# EAGLE board toyotune_3s_lvc3 (EAGLE 7.6.0)
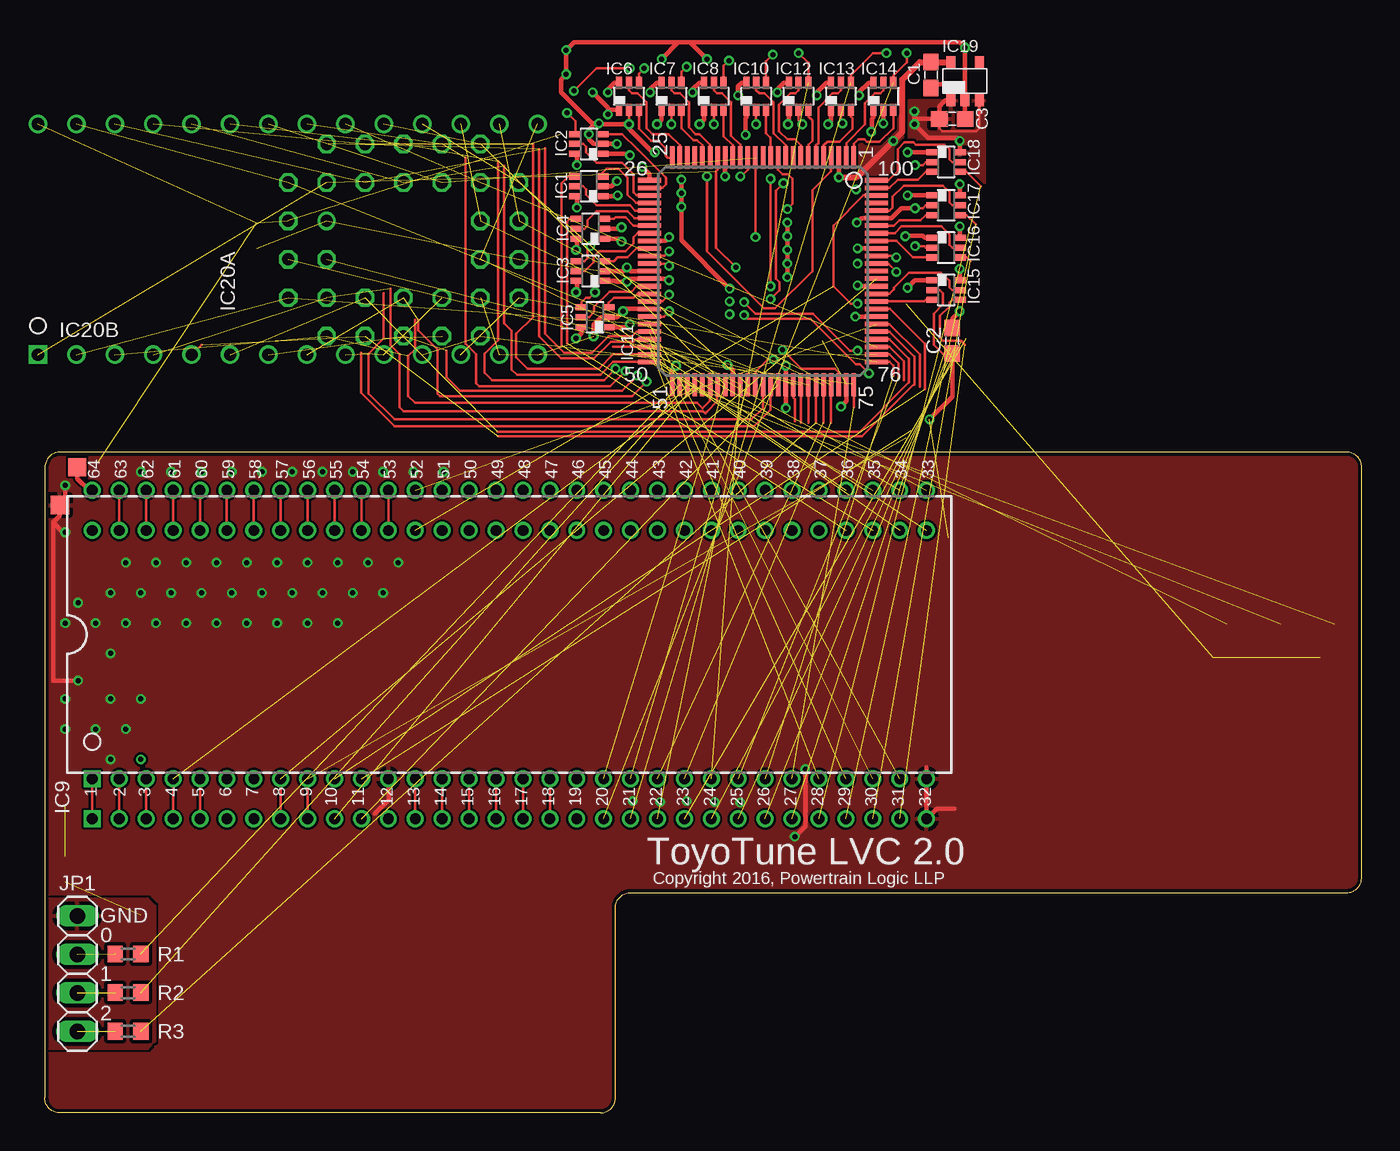
[diagram p0: board, top side]
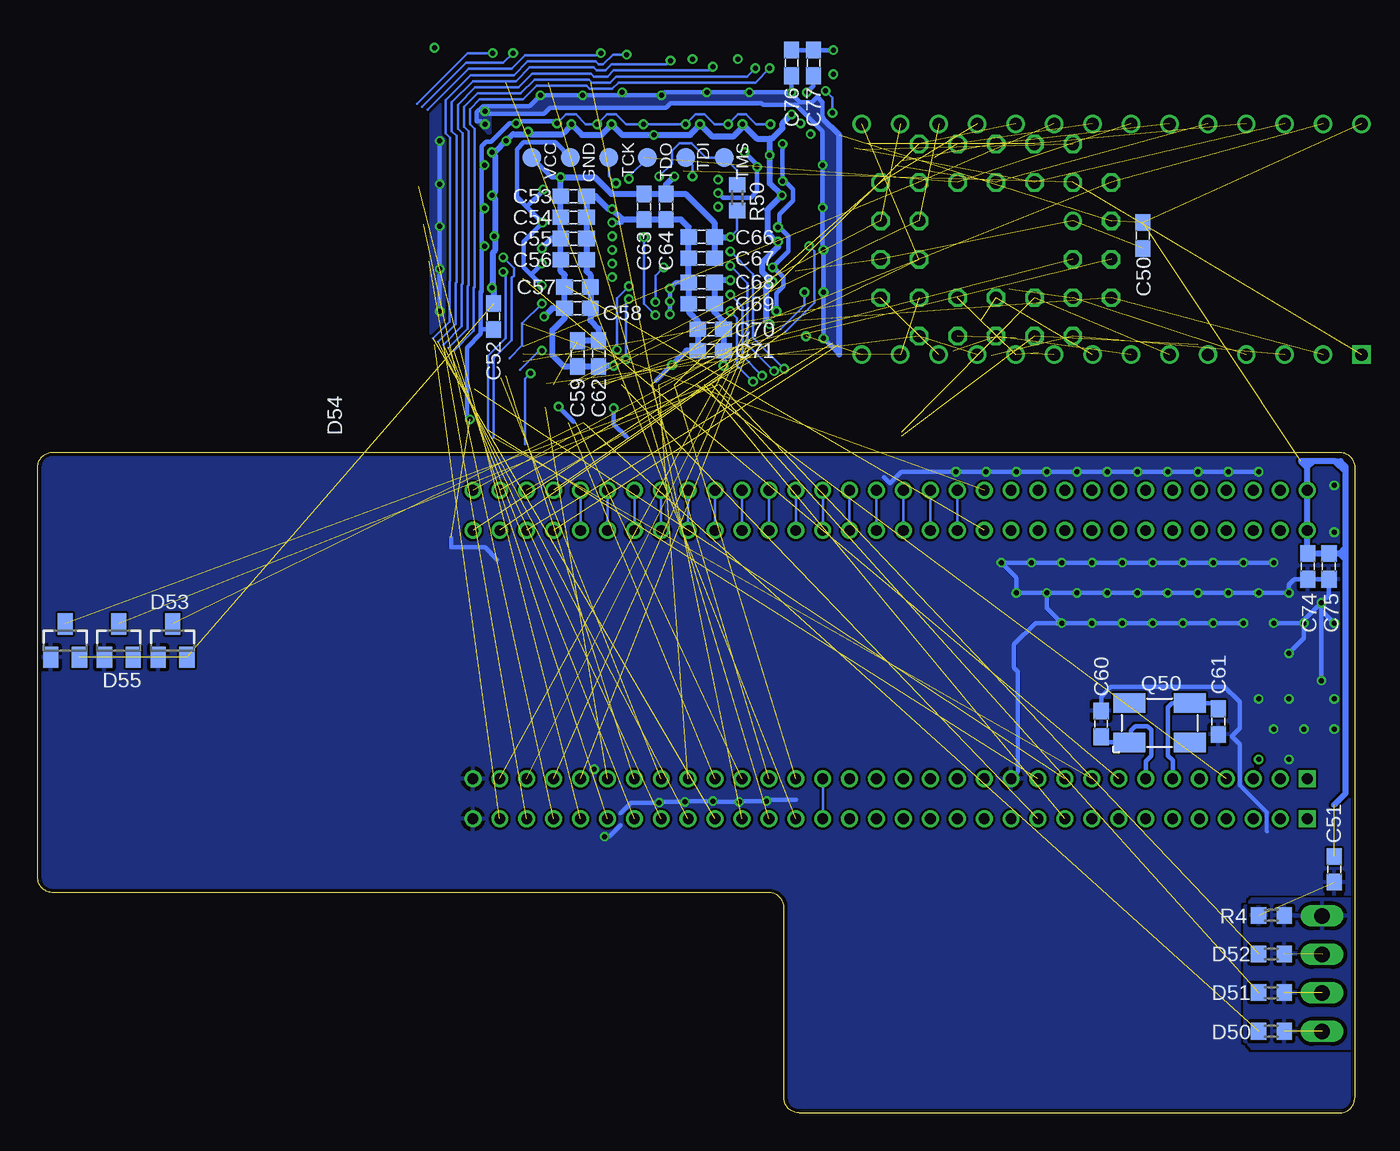
[diagram p1: board, bottom side, seen from below]

Size 87 x 43.65 mm. Coordinates in mm from the lower left corner, seen from the top.
Outline: 1.05,43.65 arc90 0,42.65 0,1 arc90 1,0 36.7,0 arc90 37.7,1 37.7,13.55 arc-90 38.7,14.55 86,14.55 arc90 87,15.55 87,42.65 arc90 86,43.65 1.05,43.65
Copper layers (1*16): Top 0.035mm / dielectric 1.5mm / Bottom 0.035mm
Design rules "pcbway": minimum track width 6mil, minimum drill 12mil, track to track 6mil, track to pad 6mil, pad to pad 6mil, via to via 6mil, smd to smd 0mil, copper to edge 10mil, drill to drill 10mil, minimum pad ring 8mil, minimum via ring 6mil, stop-mask expansion 2mil, vias tented up to drill 100mil, thermal gap 10mil

## Footprints (pad centres in the part's own frame; a part is rotated, then mirrored left to right if it is on the bottom)
C0603 = smd 1.1 x 1: 1 -0.85,0; 2 0.85,0
R0603 = smd 1 x 1.1: 1 -0.85,0; 2 0.85,0
SOT23 = smd 1 x 1.4: 1 -0.95,-1.1; 2 0.95,-1.1; 3 0,1.1
DCK_R-PDSO-G6 = smd 0.4 x 0.8: 1 -0.65,-0.9; 2 0,-0.9; 3 0.65,-0.9; 4 0.65,0.9; 5 0,0.9; 6 -0.65,0.9
SDIP-64 = drill 0.711 square: 1 -27.559,-9.525 | drill 0.711: 2 -25.781,-9.525; 3 -24.003,-9.525; 4 -22.225,-9.525; 5 -20.447,-9.525; 6 -18.669,-9.525; 7 -16.891,-9.525; 8 -15.113,-9.525; 9 -13.335,-9.525; 10 -11.557,-9.525; 11 -9.779,-9.525; 12 -8.001,-9.525; 13 -6.223,-9.525; 14 -4.445,-9.525; 15 -2.667,-9.525; 16 -0.889,-9.525; 17 0.889,-9.525; 18 2.667,-9.525; 19 4.445,-9.525; 20 6.223,-9.525; 21 8.001,-9.525; 22 9.779,-9.525; 23 11.557,-9.525; 24 13.335,-9.525; 25 15.113,-9.525; 26 16.891,-9.525; 27 18.669,-9.525; 28 20.447,-9.525; 29 22.225,-9.525; 30 24.003,-9.525; 31 25.781,-9.525; 32 27.559,-9.525; 33 27.559,9.525; 34 25.781,9.525; 35 24.003,9.525; 36 22.225,9.525; 37 20.447,9.525; 38 18.669,9.525; 39 16.891,9.525; 40 15.113,9.525; 41 13.335,9.525; 42 11.557,9.525; 43 9.779,9.525; 44 8.001,9.525; 45 6.223,9.525; 46 4.445,9.525; 47 2.667,9.525; 48 0.889,9.525; 49 -0.889,9.525; 50 -2.667,9.525; 51 -4.445,9.525; 52 -6.223,9.525; 53 -8.001,9.525; 54 -9.779,9.525; 55 -11.557,9.525; 56 -13.335,9.525; 57 -15.113,9.525; 58 -16.891,9.525; 59 -18.669,9.525; 60 -20.447,9.525; 61 -22.225,9.525; 62 -24.003,9.525; 63 -25.781,9.525; 64 -27.559,9.525
VQ100 = smd 1.5 x 0.3: 1 -7.5,6; 2 -7.5,5.5; 3 -7.5,5; 4 -7.5,4.5; 5 -7.5,4; 6 -7.5,3.5; 7 -7.5,3; 8 -7.5,2.5; 9 -7.5,2; 10 -7.5,1.5; 11 -7.5,1; 12 -7.5,0.5; 13 -7.5,0; 14 -7.5,-0.5; 15 -7.5,-1; 16 -7.5,-1.5; 17 -7.5,-2; 18 -7.5,-2.5; 19 -7.5,-3; 20 -7.5,-3.5; 21 -7.5,-4; 22 -7.5,-4.5; 23 -7.5,-5; 24 -7.5,-5.5; 25 -7.5,-6; 51 7.5,-6; 52 7.5,-5.5; 53 7.5,-5; 54 7.5,-4.5; 55 7.5,-4; 56 7.5,-3.5; 57 7.5,-3; 58 7.5,-2.5; 59 7.5,-2; 60 7.5,-1.5; 61 7.5,-1; 62 7.5,-0.5; 63 7.5,0; 64 7.5,0.5; 65 7.5,1; 66 7.5,1.5; 67 7.5,2; 68 7.5,2.5; 69 7.5,3; 70 7.5,3.5; 71 7.5,4; 72 7.5,4.5; 73 7.5,5; 74 7.5,5.5; 75 7.5,6 | smd 0.3 x 1.5: 26 -6,-7.5; 27 -5.5,-7.5; 28 -5,-7.5; 29 -4.5,-7.5; 30 -4,-7.5; 31 -3.5,-7.5; 32 -3,-7.5; 33 -2.5,-7.5; 34 -2,-7.5; 35 -1.5,-7.5; 36 -1,-7.5; 37 -0.5,-7.5; 38 0,-7.5; 39 0.5,-7.5; 40 1,-7.5; 41 1.5,-7.5; 42 2,-7.5; 43 2.5,-7.5; 44 3,-7.5; 45 3.5,-7.5; 46 4,-7.5; 47 4.5,-7.5; 48 5,-7.5; 49 5.5,-7.5; 50 6,-7.5; 76 6,7.5; 77 5.5,7.5; 78 5,7.5; 79 4.5,7.5; 80 4,7.5; 81 3.5,7.5; 82 3,7.5; 83 2.5,7.5; 84 2,7.5; 85 1.5,7.5; 86 1,7.5; 87 0.5,7.5; 88 0,7.5; 89 -0.5,7.5; 90 -1,7.5; 91 -1.5,7.5; 92 -2,7.5; 93 -2.5,7.5; 94 -3,7.5; 95 -3.5,7.5; 96 -4,7.5; 97 -4.5,7.5; 98 -5,7.5; 99 -5.5,7.5; 100 -6,7.5
DDC_R-PDSO-G5 = smd 0.6 x 0.8: 1 -0.95,-1.25; 2 0,-1.25; 3 0.95,-1.25; 4 0.95,1.25; 5 -0.95,1.25
S32 = drill 0.813: 1 1.27,5.08 | drill 0.813 octagon: 2 -1.27,7.62; 3 -1.27,5.08; 4 -3.81,7.62; 5 -6.35,5.08; 6 -3.81,5.08; 7 -6.35,2.54; 8 -3.81,2.54; 9 -6.35,0; 10 -3.81,0; 11 -6.35,-2.54; 12 -3.81,-2.54; 13 -6.35,-5.08; 14 -3.81,-7.62; 15 -3.81,-5.08; 16 -1.27,-7.62; 17 -1.27,-5.08; 18 1.27,-7.62; 19 1.27,-5.08; 20 3.81,-7.62; 21 6.35,-5.08; 22 3.81,-5.08; 23 6.35,-2.54; 24 3.81,-2.54; 25 6.35,0; 26 3.81,0; 27 6.35,2.54; 28 3.81,2.54; 29 6.35,5.08; 30 3.81,7.62; 31 3.81,5.08; 32 1.27,7.62
PDIP28 = drill 0.813 square: 1 -16.51,-7.62 | drill 0.813: 2 -13.97,-7.62; 3 -11.43,-7.62; 4 -8.89,-7.62; 5 -6.35,-7.62; 6 -3.81,-7.62; 7 -1.27,-7.62; 8 1.27,-7.62; 9 3.81,-7.62; 10 6.35,-7.62; 11 8.89,-7.62; 12 11.43,-7.62; 13 13.97,-7.62; 14 16.51,-7.62; 15 16.51,7.62; 16 13.97,7.62; 17 11.43,7.62; 18 8.89,7.62; 19 6.35,7.62; 20 3.81,7.62; 21 1.27,7.62; 22 -1.27,7.62; 23 -3.81,7.62; 24 -6.35,7.62; 25 -8.89,7.62; 26 -11.43,7.62; 27 -13.97,7.62; 28 -16.51,7.62
1X04 = drill 1.016 long: 1 -3.81,0; 2 -1.27,0; 3 1.27,0; 4 3.81,0
1X06_SMD = smd 1.27 x 1.27: GND 3.81,0; TCK 1.27,0; TDI -3.81,0; TDO -1.27,0; TMS -6.35,0; VCC 6.35,0
CRYSTAL-SMD-5X3 = smd 2.1 x 1.3: 1 -2,-1.3; 2 2,-1.3; 3 2,1.3; 4 -2,1.3
TP12SQ = smd 1.2 x 1.2: TP 0,0
SDIP-64-CONN = drill 0.711 square: 1 -27.559,-9.525 | drill 0.711: 2 -25.781,-9.525; 3 -24.003,-9.525; 4 -22.225,-9.525; 5 -20.447,-9.525; 6 -18.669,-9.525; 7 -16.891,-9.525; 8 -15.113,-9.525; 9 -13.335,-9.525; 10 -11.557,-9.525; 11 -9.779,-9.525; 12 -8.001,-9.525; 13 -6.223,-9.525; 14 -4.445,-9.525; 15 -2.667,-9.525; 16 -0.889,-9.525; 17 0.889,-9.525; 18 2.667,-9.525; 19 4.445,-9.525; 20 6.223,-9.525; 21 8.001,-9.525; 22 9.779,-9.525; 23 11.557,-9.525; 24 13.335,-9.525; 25 15.113,-9.525; 26 16.891,-9.525; 27 18.669,-9.525; 28 20.447,-9.525; 29 22.225,-9.525; 30 24.003,-9.525; 31 25.781,-9.525; 32 27.559,-9.525; 33 27.559,9.525; 34 25.781,9.525; 35 24.003,9.525; 36 22.225,9.525; 37 20.447,9.525; 38 18.669,9.525; 39 16.891,9.525; 40 15.113,9.525; 41 13.335,9.525; 42 11.557,9.525; 43 9.779,9.525; 44 8.001,9.525; 45 6.223,9.525; 46 4.445,9.525; 47 2.667,9.525; 48 0.889,9.525; 49 -0.889,9.525; 50 -2.667,9.525; 51 -4.445,9.525; 52 -6.223,9.525; 53 -8.001,9.525; 54 -9.779,9.525; 55 -11.557,9.525; 56 -13.335,9.525; 57 -15.113,9.525; 58 -16.891,9.525; 59 -18.669,9.525; 60 -20.447,9.525; 61 -22.225,9.525; 62 -24.003,9.525; 63 -25.781,9.525; 64 -27.559,9.525

## Placement (x,y rotation side)
C1  1uF  [C0603]  58.55,68.55 270 top  (outside the outline)
C2  0.1uF  [C0603]  59.95,51 90 top  (outside the outline)
C3  1uF  [C0603]  59.95,65.65 0 top  (outside the outline)
C50  0.1uF  [C0603]  14,57.95 90 bottom  (outside the outline)
C51  0.1uF  [C0603]  1.35,16.1 90 bottom
C52  0.1uF  [C0603]  56.9,52.6 90 bottom  (outside the outline)
C53  0.01uF  [C0603]  51.6,60.55 180 bottom  (outside the outline)
C54  0.1uF  [C0603]  51.6,59.15 180 bottom  (outside the outline)
C55  0.01uF  [C0603]  51.6,57.75 180 bottom  (outside the outline)
C56  0.1uF  [C0603]  51.6,56.35 180 bottom  (outside the outline)
C57  0.1uF  [C0603]  51.35,54.55 180 bottom  (outside the outline)
C58  0.01uF  [C0603]  51.35,53.15 180 bottom  (outside the outline)
C59  0.1uF  [C0603]  51.35,50.15 270 bottom  (outside the outline)
C60  10pF  [C0603]  16.75,25.7 90 bottom
C61  10pF  [C0603]  9,25.85 90 bottom
C62  0.01uF  [C0603]  49.95,50.15 270 bottom  (outside the outline)
C63  0.1uF  [C0603]  46.95,59.85 90 bottom  (outside the outline)
C64  0.01uF  [C0603]  45.5,59.85 90 bottom  (outside the outline)
C66  0.01uF  [C0603]  43.15,57.85 0 bottom  (outside the outline)
C67  0.1uF  [C0603]  43.15,56.45 0 bottom  (outside the outline)
C68  0.01uF  [C0603]  43.15,54.85 0 bottom  (outside the outline)
C69  0.1uF  [C0603]  43.15,53.45 0 bottom  (outside the outline)
C70  0.1uF  [C0603]  42.55,51.75 0 bottom  (outside the outline)
C71  0.01uF  [C0603]  42.55,50.35 0 bottom  (outside the outline)
C74  0.01uF  [C0603]  3.1,36.1 90 bottom
C75  0.1uF  [C0603]  1.7,36.1 90 bottom
C76  0.1uF  [C0603]  37.2,69.35 270 bottom  (outside the outline)
C77  0.1uF  [C0603]  35.75,69.35 270 bottom  (outside the outline)
D50  PGB1010603  [R0603]  5.5,5.4 180 bottom
D51  PGB1010603  [R0603]  5.5,7.95 180 bottom
D52  PGB1010603  [R0603]  5.5,10.5 180 bottom
D53  BAT54S  [SOT23]  78.1,31.2 0 bottom
D54  BAT54S  [SOT23]  85.2,31.2 0 bottom
D55  BAT54S  [SOT23]  81.65,31.2 0 bottom
IC1  SN74LVC1T45DCK  [DCK_R-PDSO-G6]  35.95,61.2 90 top  (outside the outline)
IC2  SN74LVC1T45DCK  [DCK_R-PDSO-G6]  35.95,64 90 top  (outside the outline)
IC3  SN74LVC1T45DCK  [DCK_R-PDSO-G6]  36.05,55.6 90 top  (outside the outline)
IC4  SN74LVC1T45DCK  [DCK_R-PDSO-G6]  36.05,58.4 90 top  (outside the outline)
IC5  SN74LVC1T45DCK  [DCK_R-PDSO-G6]  36.35,52.55 90 top  (outside the outline)
IC6  SN74LVC1T45DCK  [DCK_R-PDSO-G6]  38.6,67.15 0 top  (outside the outline)
IC7  SN74LVC1T45DCK  [DCK_R-PDSO-G6]  41.4,67.15 0 top  (outside the outline)
IC8  SN74LVC1T45DCK  [DCK_R-PDSO-G6]  44.2,67.15 0 top  (outside the outline)
IC9  D15180X-XXXX  [SDIP-64]  30.7,31.6 0 top
IC10  SN74LVC1T45DCK  [DCK_R-PDSO-G6]  47,67.15 0 top  (outside the outline)
IC11  XCR3128XL  [VQ100]  47.45,55.6 270 top  (outside the outline)
IC12  SN74LVC1T45DCK  [DCK_R-PDSO-G6]  49.8,67.15 0 top  (outside the outline)
IC13  SN74LVC1T45DCK  [DCK_R-PDSO-G6]  52.6,67.15 0 top  (outside the outline)
IC14  SN74LVC1T45  [DCK_R-PDSO-G6]  55.4,67.15 0 top  (outside the outline)
IC15  SN74LVC1T45DCK  [DCK_R-PDSO-G6]  59.55,54.35 270 top  (outside the outline)
IC16  SN74LVC1T45DCK  [DCK_R-PDSO-G6]  59.55,57.15 270 top  (outside the outline)
IC17  SN74LVC1T45DCK  [DCK_R-PDSO-G6]  59.55,59.95 270 top  (outside the outline)
IC18  SN74LVC1T45DCK  [DCK_R-PDSO-G6]  59.55,62.8 270 top  (outside the outline)
IC19  TLV70033  [DDC_R-PDSO-G5]  60.8,68.15 0 top  (outside the outline)
IC20A  SST39SF020WH  [S32]  23.7,57.65 90 top  (outside the outline)
IC20B  AT29C256  [PDIP28]  16.05,57.7 0 top  (outside the outline)
JP1  [1X04]  2.15,9.2 270 top
JP50  JTAG  [1X06_SMD]  48,63.1 180 bottom  (outside the outline)
Q50  16Mhz  [CRYSTAL-SMD-5X3]  12.89,25.77 0 bottom
R1  470R  [R0603]  5.5,10.5 180 top
R2  470R  [R0603]  5.5,7.95 180 top
R3  470R  [R0603]  5.5,5.4 180 top
R4  470R  [R0603]  5.5,13.05 180 bottom
R50  10K  [R0603]  40.8,60.45 270 bottom  (outside the outline)
TP_GND  TPSQTP12SQ  [TP12SQ]  1,40.15 0 top
TP_VCC  TPSQTP12SQ  [TP12SQ]  2.15,42.65 0 top
U1  D151803-CONN  [SDIP-64-CONN]  30.7,28.95 0 top

## Library data of the parts
C1-C3 C50-C64 C66-C71 C74-C77 D50-D55 IC1-IC18 IC20A IC20B JP1 JP50 Q50 R1-R4 R50 U1 = toyotune
IC19 = toyota-ecu
TP_GND TP_VCC = testpad

## Nets
!D_HALT: IC9.51 U1.51
!D_INIT: IC9.52 IC11.81
!D_IRL: IC9.5 U1.5
!D_IRP: IC9.4 IC11.55 U1.4
!D_NMI: IC9.3 U1.3
!D_RD: IC9.10 IC11.83
!D_TEST: IC9.49 U1.49
!D_WDC: IC9.53 U1.53
!D_WI: IC9.50 U1.50
!D_WR: IC9.11 IC11.89
!E_INIT: IC11.98 U1.52
!E_IS: IC11.54 U1.10
!E_OS: IC11.65 U1.11
!M_RD: IC11.14 IC20A.24 IC20B.22
!M_ROM_CS: IC11.78 IC20A.22 IC20B.20
!M_WR/M_A15: IC11.19 IC20A.31 IC20B.1
C_DRA0: IC1.5 IC11.30
C_DRA1: IC4.5 IC11.31
C_DRA2: IC3.5 IC11.33
C_DRA3: IC5.5 IC11.40
C_DRA4: IC11.85 IC15.5
C_DRA5: IC11.93 IC16.5
C_DRA6: IC11.96 IC17.5
C_DRA7: IC11.100 IC18.5
C_DRB0: IC2.5 IC11.28
C_DRB1: IC6.5 IC11.24
C_DRB2: IC7.5 IC11.20
C_DRB3: IC8.5 IC11.16
C_DRB4: IC10.5 IC11.10
C_DRB5: IC11.8 IC12.5
C_DRB6: IC11.6 IC13.5
C_DRB7: IC11.2 IC14.5
C_PA0: IC1.3 IC11.29
C_PA1: IC4.3 IC11.32
C_PA2: IC3.3 IC11.35
C_PA3: IC5.3 IC11.41
C_PA4: IC11.84 IC15.3
C_PA5: IC11.92 IC16.3
C_PA6: IC11.94 IC17.3
C_PA7: IC11.99 IC18.3
C_PB0: IC2.3 IC11.27
C_PB1: IC6.3 IC11.25
C_PB2: IC7.3 IC11.21
C_PB3: IC8.3 IC11.17
C_PB4: IC10.3 IC11.12
C_PB5: IC11.7 IC12.3
C_PB6: IC11.5 IC13.3
C_PB7: IC11.1 IC14.3
D1_XIN: C61.2 IC9.6 Q50.3
D1_XOUT: C60.1 IC9.7 Q50.1
D_A8: IC9.36 IC11.49 IC20A.27 IC20B.25
D_A9: IC9.35 IC11.50 IC20A.26 IC20B.24
D_A10: IC9.34 IC11.37 IC20A.23 IC20B.21
D_A11: IC9.33 IC11.36 IC20A.25 IC20B.23
D_A12: IC9.31 IC11.45 IC20A.4 IC20B.2
D_A13: IC9.30 IC11.46 IC20A.28 IC20B.26
D_A14: IC9.29 IC11.47 IC20A.29
D_A15: IC9.28 IC11.48
D_ADR: IC9.9 IC11.90 U1.9
D_AL0: IC11.64 IC20A.12 IC20B.10
D_AL1: IC11.63 IC20A.11 IC20B.9
D_AL2: IC11.44 IC20A.10 IC20B.8
D_AL3: IC11.42 IC20A.9 IC20B.7
D_AL4: IC11.79 IC20A.8 IC20B.6
D_AL5: IC11.80 IC20A.7 IC20B.5
D_AL6: IC11.57 IC20A.6 IC20B.4
D_AL7: IC11.56 IC20A.5 IC20B.3
D_ASR0: IC9.2 U1.2
D_ASR1: IC9.1 U1.1
D_ASR2: IC9.63 U1.63
D_ASR3: IC9.62 U1.62
D_CCLK: IC9.8 IC11.87 U1.8
D_DA0: IC9.27 IC11.75 IC20A.13 IC20B.11
D_DA1: IC9.26 IC11.76 IC20A.14 IC20B.12
D_DA2: IC9.25 IC11.77 IC20A.15 IC20B.13
D_DA3: IC9.24 IC11.60 IC20A.17 IC20B.15
D_DA4: IC9.23 IC11.72 IC20A.18 IC20B.16
D_DA5: IC9.22 IC11.71 IC20A.19 IC20B.17
D_DA6: IC9.21 IC11.61 IC20A.20 IC20B.18
D_DA7: IC9.20 IC11.58 IC20A.21 IC20B.19
D_DOUT0: IC9.61 U1.61
D_DOUT1: IC9.60 U1.60
D_DOUT2: IC9.59 U1.59
D_DOUT3: IC9.58 U1.58
D_DOUT4: IC9.57 U1.57
D_DOUT5: IC9.56 U1.56
D_DOUT6: IC9.55 U1.55
D_DOUT7: IC9.54 U1.54
D_PA0: IC1.4 U1.36
D_PA1: IC4.4 U1.35
D_PA2: IC3.4 U1.34
D_PA3: IC5.4 U1.33
D_PA4: IC15.4 U1.31
D_PA5: IC16.4 U1.30
D_PA6: IC17.4 U1.29
D_PA7: IC18.4 U1.28
D_PB0: IC2.4 U1.27
D_PB1: IC6.4 U1.26
D_PB2: IC7.4 U1.25
D_PB3: IC8.4 U1.24
D_PB4: IC10.4 U1.23
D_PB5: IC12.4 U1.22
D_PB6: IC13.4 U1.21
D_PB7: IC14.4 U1.20
D_PC0: IC9.48 U1.48
D_PC1: IC9.47 U1.47
D_PC2: IC9.46 U1.46
D_PC3: IC9.45 U1.45
D_PC4: IC9.44 U1.44
D_PC5: IC9.43 U1.43
D_PC6: IC9.42 U1.42
D_PC7: IC9.41 U1.41
D_PD0: IC9.40 U1.40
D_PD1: IC9.39 U1.39
D_PD2: IC9.38 U1.38
D_PD3: IC9.37 U1.37
D_SCLK: IC9.13 U1.13
D_SIN0: IC9.17 U1.17
D_SIN1: IC9.16 U1.16
D_SIN2: IC9.15 U1.15
D_SIN3: IC9.14 U1.14
D_SOUT0: IC9.19 U1.19
D_SOUT1: IC9.18 U1.18
GND: C1.2 C2.1 C3.2 C50.1 C51.1 C52.1 C53.1 C54.1 C55.1 C56.1 C57.1 C58.1 C59.1 C60.2 C61.1 C62.1 C63.1 C64.1 C66.1 C67.1 C68.1 C69.1 C70.1 C71.1 C74.1 C75.1 C76.1 C77.1 D53.1 D54.1 D55.1 IC1.2 IC2.2 IC3.2 IC4.2 IC5.2 IC6.2 IC7.2 IC8.2 IC9.12 IC9.32 IC10.2 IC11.11 IC11.26 IC11.38 IC11.43 IC11.59 IC11.74 IC11.86 IC11.95 IC12.2 IC13.2 IC14.2 IC15.2 IC16.2 IC17.2 IC18.2 IC19.2 IC20A.1 IC20A.16 IC20B.14 JP50.GND R4.2 TP_GND.TP U1.32
M_A15: IC11.69 IC20A.3
M_A16: IC11.68 IC20A.2
M_A17/M_A14: IC11.67 IC20A.30 IC20B.27
MSEL0: D52.2 D55.3 IC11.52 R1.1
MSEL0_ECU: JP1.2 R1.2
MSEL1: D51.2 D54.3 IC11.53 R2.1
MSEL1_ECU: JP1.3 R2.2
MSEL2: D50.2 D53.3 IC11.70 R3.1
MSEL2_ECU: JP1.4 R3.2
N$28: U1.6
N$29: U1.7
N$30: U1.12
NC1: IC11.13
NC2: IC11.22
NC3: IC11.23
NC4: IC11.9
NC5: IC11.88
NC6: IC11.97
SGND: D50.1 D51.1 D52.1 JP1.1 R4.1
TCK: IC11.62 JP50.TCK
TDI: IC11.4 JP50.TDI
TDO: IC11.73 JP50.TDO
TMS: IC11.15 JP50.TMS R50.1
VCC: C2.2 C3.1 C50.2 C51.2 C74.2 C75.2 C76.2 IC1.6 IC2.6 IC3.6 IC4.6 IC5.6 IC6.6 IC7.6 IC8.6 IC9.64 IC10.6 IC12.6 IC13.6 IC14.6 IC15.6 IC16.6 IC17.6 IC18.6 IC19.1 IC19.3 IC20A.32 IC20B.28 TP_VCC.TP U1.64
VCC_CPLD: C1.1 C52.2 C53.2 C54.2 C55.2 C56.2 C57.2 C58.2 C59.2 C62.2 C63.2 C64.2 C66.2 C67.2 C68.2 C69.2 C70.2 C71.2 C77.2 D53.2 D54.2 D55.2 IC1.1 IC2.1 IC3.1 IC4.1 IC5.1 IC6.1 IC7.1 IC8.1 IC10.1 IC11.3 IC11.18 IC11.34 IC11.39 IC11.51 IC11.66 IC11.82 IC11.91 IC12.1 IC13.1 IC14.1 IC15.1 IC16.1 IC17.1 IC18.1 IC19.5 JP50.VCC R50.2

## Tracks (layer width: path | path; a pad name or v marks a point on that pad's centre or on a via)
!D_HALT
  Bottom 0.178: U1.51 IC9.51
!D_INIT  (1 unrouted)
  Top 0.178: IC11.81 55.8,52.1 57.8,50.1 57.8,47.95
!D_IRL
  Top 0.178: U1.5 IC9.5
!D_IRP  (1 unrouted)
  Top 0.178: U1.4 IC9.4
!D_NMI
  Top 0.178: U1.3 IC9.3
!D_RD  (1 unrouted)
  Top 0.178: IC11.83 55.85,53.1 58.15,50.8 58.15,47.8
!D_TEST
  Bottom 0.178: U1.49 IC9.49
!D_WDC
  Top 0.178: U1.53 IC9.53
!D_WI
  Bottom 0.178: U1.50 IC9.50
!D_WR  (via drill 0.33)  (1 unrouted)
  Top 0.178: IC11.89 55.75,56.1 56.3,55.55 v56.25,55.55
  Bottom 0.178: v56.25,55.55 56.1,55.4 56.1,51.15 57.25,50 57.25,45.1
!E_INIT  (via drill 0.33)  (1 unrouted)
  Top 0.178: IC11.98 54.1,60.6 52.1,58.6 52.1,54.6 53.25,53.45 v53.7,53.45
  Bottom 0.178: 55.85,49.85 55,50.7 55,52.15 v53.7,53.45
!E_IS  (1 unrouted)
!E_OS  (1 unrouted)
!M_RD  (via drill 0.33)  (2 unrouted)
  Top 0.178: v46.95,57.85 IC11.14 | v46.2,52.7 46.45,52.45 50.6,52.45 53.6,49.45 53.85,49.45 v54.45,48.85
  Bottom 0.178: v46.95,57.85 46.95,53.45 v46.2,52.7 | v54.45,48.85 54.8,48.5 54.8,44.15
!M_ROM_CS  (2 unrouted)
  Top 0.178: IC11.78 55.8,50.6 56.75,49.65 56.75,48.4
!M_WR/M_A15  (via drill 0.33)  (2 unrouted)
  Top 0.178: IC11.19 44.45,62.3 44.35,62.2 44.35,57.15 v45.65,55.85 | v53.7,50.35 53.2,50.35 50.75,52.8 46.95,52.8 v46.2,53.55
  Bottom 0.178: v45.65,55.85 46.2,55.3 v46.2,53.55 | v53.7,50.35 53.9,50.35 55.15,49.1
C_DRA0
  Top 0.178: IC11.30 39,59.6 38.65,59.95 36.45,59.95 35.75,60.65 35.75,61 35.55,61.2 IC1.5
C_DRA1
  Top 0.178: IC4.5 35.65,58.4 35.85,58.6 35.85,58.95 36.45,59.55 38.5,59.55 38.95,59.1 IC11.31
C_DRA2
  Top 0.178: IC3.5 35.65,55.6 36.25,56.2 36.25,56.55 36.6,56.9 38.35,56.9 38.9,57.45 38.9,57.85 39.15,58.1 IC11.33
C_DRA3
  Top 0.178: IC11.40 39.1,54.6 38.75,54.25 37.3,54.25 36.3,53.25 36.3,52.9 35.95,52.55 IC5.5
C_DRA4
  Top 0.178: IC15.5 59.95,54.35 59.75,54.55 59.75,54.95 59.2,55.5 57.1,55.5 56.1,54.5 56.1,54.4 55.8,54.1 IC11.85
C_DRA5
  Top 0.178: IC16.5 59.95,57.15 59.75,57.35 59.75,58.05 59.25,58.55 56.6,58.55 56.15,58.1 IC11.93
C_DRA6
  Top 0.178: IC17.5 59.95,59.95 59.75,60.15 59.75,60.85 59.35,61.25 56.75,61.25 56,60.5 56,59.8 55.8,59.6 IC11.96
C_DRA7
  Top 0.178: IC18.5 59.95,62.8 59.75,63 59.75,63.65 59.45,63.95 57.55,63.95 57.4,64.1 56.8,64.1 56.35,63.65 56.35,62.2 55.75,61.6 IC11.100
C_DRB0
  Top 0.178: IC11.28 39.1,60.6 38.9,60.8 38.9,62 38.15,62.75 36.45,62.75 35.75,63.45 35.75,63.8 35.55,64 IC2.5
C_DRB1
  Top 0.178: IC11.24 41.95,63.9 41.2,64.65 40.15,64.65 39.75,65.05 39.75,66.75 39.15,67.35 38.8,67.35 38.6,67.55 IC6.5
C_DRB2
  Top 0.178: IC11.20 43.95,63.95 43.25,64.65 43,64.65 42.55,65.1 42.55,66.75 41.95,67.35 41.6,67.35 41.4,67.55 IC7.5
C_DRB3
  Top 0.178: IC11.16 45.95,63.95 45.35,64.55 45.35,66.75 44.75,67.35 44.4,67.35 44.2,67.55 IC8.5
C_DRB4
  Top 0.178: IC11.10 48.95,63.9 48.15,64.7 48.15,66.75 47.55,67.35 47.2,67.35 47,67.55 IC10.5
C_DRB5
  Top 0.178: IC11.8 49.95,63.9 49.55,64.3 49.05,64.3 48.5,64.85 48.5,66.6 49.25,67.35 49.6,67.35 49.8,67.55 IC12.5
C_DRB6
  Top 0.178: IC11.6 50.95,63.9 51.1,64.05 51.1,66.4 52.05,67.35 52.4,67.35 52.6,67.55 IC13.5
C_DRB7
  Top 0.178: IC14.5 55.4,67.55 55.2,67.35 54.85,67.35 54.2,66.7 54.2,65.3 52.95,64.05 IC11.2
C_PA0
  Top 0.178: IC1.3 36.85,62.1 37.1,62.35 37.9,62.35 38.5,61.75 38.5,60.65 39.05,60.1 IC11.29
C_PA1
  Top 0.178: IC11.32 38.9,58.6 38.35,59.15 37.7,59.15 37.6,59.05 IC4.3
C_PA2
  Top 0.178: IC3.3 37.6,56.25 37.85,56.5 38.5,56.5 39.1,57.1 IC11.35
C_PA3
  Top 0.178: IC5.3 37.25,53.5 37.6,53.85 38.9,53.85 39.15,54.1 IC11.41
C_PA4
  Top 0.178: IC15.3 58.2,53.7 58.1,53.6 IC11.84
C_PA5
  Top 0.178: 54.75,57.6 IC11.92 56.25,57.6 57.35,56.5 IC16.3
C_PA6
  Top 0.178: 54.8,58.6 IC11.94 56.1,58.6 56.45,58.95 57.85,58.95 58.2,59.3 IC17.3
C_PA7
  Top 0.178: IC11.99 55.8,61.1 56.35,61.65 57.7,61.65 58.2,62.15 IC18.3
C_PB0
  Top 0.178: IC2.3 38.15,64.65 39.15,63.65 41,61.8 41.05,61.75 41.05,61.35 40.8,61.1 IC11.27
C_PB1
  Top 0.178: 41.15,63.1 | 41.15,63.1 41,63.25 41,63.7 40.5,64.2 40.05,64.2 39.25,65 IC6.3 | IC11.25 41.15,63.1
C_PB2
  Top 0.178: IC7.3 42.05,65.05 42.85,64.25 43.1,64.25 43.45,63.9 IC11.21
C_PB3
  Top 0.178: IC11.17 45.45,63.9 44.85,64.5 IC8.3
C_PB4
  Top 0.178: IC10.3 47.65,64.7 47.95,64.4 IC11.12
C_PB5
  Top 0.178: IC11.7 50.45,63.95 50.7,64.2 50.7,65.55 50.45,65.8 IC12.3
C_PB6
  Top 0.178: IC13.3 53.25,65.8 53.35,65.7 53.35,65 52.5,64.15 51.7,64.15 51.45,63.9 IC11.5
C_PB7
  Top 0.178: IC14.3 56.05,65.05 55.15,64.15 54.3,64.15 54.15,64.3 53.75,64.3 53.45,64 IC11.1
D1_XIN
  Bottom 0.305: IC9.6 12.03,23.28 12.35,23.6 12.35,26.8 12.08,27.07 Q50.3 9,27.07 C61.2
D1_XOUT
  Bottom 0.305: IC9.7 13.81,23.24 13.45,23.6 13.45,25.3 13.7,25.55 14.5,25.55 14.8,25.25 14.8,24.56 Q50.1 16.75,24.47 C60.1
D_A8  (3 unrouted)
  Top 0.178: IC11.49 37.55,50.1 36.6,49.15 31.9,49.15 31.15,49.9 31.15,51.45 32.25,52.55 32.25,64
D_A9  (3 unrouted)
  Top 0.178: IC11.50 37.55,49.6 36.7,48.75 31.2,48.75 30.85,49.1 30.85,51.65 30.35,52.15 30.35,62.55
D_A10  (via drill 0.33)  (3 unrouted)
  Top 0.178: IC11.37 41.1,56.1 v41.25,55.95 | v38.35,49 37.35,48 28.7,48 28.5,48.2 28.5,50.1 27.8,50.8 27.8,63.1
  Bottom 0.178: v41.25,55.95 40.1,54.8 40.1,50.75 v38.35,49
D_A11  (via drill 0.33)  (3 unrouted)
  Top 0.178: IC11.36 40.95,56.6 v41.25,56.9 | v37.7,49.15 36.95,48.4 29.55,48.4 29.05,48.9 29.05,50.15 29.95,51.05 29.95,62.85
  Bottom 0.178: v41.25,56.9 39.75,55.4 39.75,51.2 v37.7,49.15
D_A12  (3 unrouted)
D_A13  (3 unrouted)
  Top 0.178: IC11.46 39.1,51.6 38.8,51.3 37.25,51.3 36.15,50.2 34.3,50.2 33.05,51.45 33.05,63.7
D_A14  (2 unrouted)
  Top 0.178: IC11.47 39.05,51.1 38.9,50.95 37.4,50.95 36.3,49.85 34.1,49.85 32.65,51.3 32.65,63.65
D_A15  (1 unrouted)
  Top 0.178: IC11.48 37.55,50.6
D_ADR  (via drill 0.33)  (1 unrouted)
  Top 0.178: U1.9 IC9.9 | IC11.90 56.15,56.6 v56.25,56.5
  Bottom 0.178: IC9.9 17.35,22.09 | v56.25,56.5 55.55,55.8 55.55,55.3 55.7,55.15 55.7,51.05 56.9,49.85 56.9,44.6
D_AL0  (2 unrouted)
  Top 0.178: IC11.64 47.95,46.45 46.85,45.35 23.1,45.35 20.9,47.55 20.9,50.2
D_AL1  (2 unrouted)
  Top 0.178: IC11.63 47.45,46.55 46.7,45.8 23.1,45.8 21.4,47.5 21.4,50.15 22.4,51.15 22.4,54.15
  Bottom 0.178: IC20B.9 | IC20A.11
D_AL2  (via drill 0.33)  (2 unrouted)
  Top 0.178: v41.25,52.95 40.9,52.6 IC11.44 | v39.75,48.3 38.8,47.35 26.1,47.35 25.95,47.5 25.95,50.4 24.65,51.7 24.65,52.4
  Bottom 0.178: v41.25,52.95 40.8,52.5 40.8,49.35 v39.75,48.3
D_AL3  (via drill 0.33)  (2 unrouted)
  Top 0.178: IC11.42 40.8,53.6 v41.25,54.05 | v39.15,48.7 38.15,47.7 27.45,47.7 26.55,48.6 26.55,50.35
  Bottom 0.178: v41.25,54.05 40.45,53.25 40.45,50 v39.15,48.7 | IC20B.7 14.8,50.08
D_AL4  (2 unrouted)
  Top 0.178: IC11.79 55.8,51.1 57.1,49.8 57.1,48.25 53.85,45 29.9,45
  Bottom 0.178: IC20B.6
D_AL5  (2 unrouted)
  Top 0.178: IC11.80 55.8,51.6 57.45,49.95 57.45,48.15 | 57.45,48.1 57.45,48.15 | IC20B.5 10.37,50.75 | 57.45,48.15 54,44.7 29.95,44.7
  Bottom 0.178: IC20A.7
D_AL6  (2 unrouted)
  Top 0.178: IC11.57 44.4,47 43.75,46.3 43.65,46.2 43.5,46.35 23.7,46.35 23.45,46.6 23.45,50.1 22.85,50.7 22.85,54.45
D_AL7  (2 unrouted)
  Top 0.178: IC11.56 43.95,47.05 43.45,46.55 43.1,46.9 24.45,46.9 24,47.35 24,50 24.45,50.45 24.45,52.4
D_ASR0
  Top 0.178: U1.2 IC9.2
D_ASR1
  Top 0.178: U1.1 IC9.1
D_ASR2
  Top 0.178: U1.63 IC9.63
D_ASR3
  Top 0.178: U1.62 IC9.62
D_CCLK  (1 unrouted)
  Top 0.178: U1.8 IC9.8
D_DA0  (3 unrouted)
  Top 0.178: 53.45,46.6 IC11.75 | IC11.75 53.45,48.2 53.4,48.25 53.4,48.15 IC11.75
D_DA1  (3 unrouted)
  Top 0.178: IC11.76 55.8,49.6 56.05,49.35 56.05,48.7
  Bottom 0.178: IC9.26
D_DA2  (3 unrouted)
  Top 0.178: IC11.77 55.8,50.1 56.4,49.5 56.4,48.55
D_DA3  (3 unrouted)
D_DA4  (3 unrouted)
  Top 0.178: 51.95,45.6 IC11.72
D_DA5  (3 unrouted)
  Top 0.178: 51.45,45.6 IC11.71
D_DA6  (3 unrouted)
D_DA7  (3 unrouted)
D_DOUT0
  Top 0.178: U1.61 IC9.61
D_DOUT1
  Top 0.178: U1.60 IC9.60
D_DOUT2
  Top 0.178: U1.59 IC9.59
D_DOUT3
  Top 0.178: U1.58 IC9.58
D_DOUT4
  Top 0.178: U1.57 IC9.57
D_DOUT5
  Top 0.178: U1.56 IC9.56
D_DOUT6
  Top 0.178: U1.55 IC9.55
D_DOUT7
  Top 0.178: U1.54 IC9.54
D_PA0  (1 unrouted)
  Top 0.178: IC1.4 34.6,61.85 34.15,61.4 34.15,50.7
D_PA1  (1 unrouted)
  Top 0.178: IC4.4 34.7,59.05 34.5,58.85 34.5,50.85
D_PA2  (via drill 0.33)  (1 unrouted)
  Top 0.178: IC3.4 35.65,56.25 35.85,56.45 35.85,57.05 v36.05,57.25
  Bottom 0.178: 37.6,51.6 35.7,53.5 35.7,56.9 v36.05,57.25
D_PA3  (via drill 0.33)  (1 unrouted)
  Top 0.178: IC5.4 35.45,53.55 35.75,53.85 36,53.85 v36.35,54.2
  Bottom 0.178: 37.95,51.75 36.35,53.35 v36.35,54.2
D_PA4  (1 unrouted)
  Top 0.178: 60.8,50.75 60.55,51 59.35,51 59.15,51.2 59.15,52.65 59.75,53.25 59.75,53.5 59.95,53.7 IC15.4
D_PA5  (1 unrouted)
  Top 0.178: 61.15,56.25 60.9,56.5 IC16.4
D_PA6  (1 unrouted)
  Top 0.178: 61.5,58.7 60.9,59.3 IC17.4
D_PA7  (1 unrouted)
  Top 0.178: 61.85,61.2 60.9,62.15 IC18.4
D_PB0  (via drill 0.33)  (1 unrouted)
  Top 0.178: IC2.4 35.05,65.5 v34.5,66.05 | v34.95,67.5 36.45,69 v38.65,69
  Bottom 0.178: 59.5,50.35 58.2,51.65 58.2,54.5 58.15,54.55 58.15,65 58.45,65.3 58.45,66.3 57.8,66.95 54.95,66.95 54.05,67.85 50.75,67.85 50.55,67.65 49.05,67.65 48.65,68.05 39.6,68.05 v38.65,69 | v34.95,67.5 34.5,67.05 v34.5,66.05
D_PB1  (via drill 0.33)  (1 unrouted)
  Top 0.178: v39.6,69 39.25,68.65 IC6.4
  Bottom 0.178: 59.85,50.55 58.6,51.8 58.6,54.6 58.55,54.65 58.55,64.85 58.85,65.15 58.85,66.45 57.95,67.35 55.1,67.35 54.2,68.25 50.6,68.25 50.4,68.05 49.2,68.05 48.8,68.45 40.15,68.45 v39.6,69
D_PB2  (via drill 0.33)  (1 unrouted)
  Top 0.178: v42.4,69.1 42.05,68.75 IC7.4
  Bottom 0.178: 60.2,50.75 59,51.95 59,54.7 58.95,54.75 58.95,64.7 59.25,65 59.25,66.6 58.1,67.75 55.25,67.75 54.35,68.65 50.45,68.65 50.25,68.45 49.35,68.45 48.95,68.85 42.65,68.85 v42.4,69.1
D_PB3  (via drill 0.33)  (1 unrouted)
  Top 0.178: v45.2,69.5 44.85,69.15 IC8.4
  Bottom 0.178: 60.55,50.95 59.4,52.1 59.4,54.8 59.35,54.85 59.35,64.55 59.65,64.85 59.65,66.75 58.25,68.15 55.4,68.15 54.5,69.05 50.3,69.05 50.1,68.85 49.5,68.85 49.1,69.25 45.45,69.25 v45.2,69.5
D_PB4  (via drill 0.33)  (1 unrouted)
  Top 0.178: v48.1,69.9 47.65,69.45 IC10.4
  Bottom 0.178: 60.9,51.15 59.8,52.25 59.8,54.9 59.75,54.95 59.75,64.4 60.05,64.7 60.05,66.9 58.4,68.55 55.55,68.55 54.65,69.45 50.15,69.45 49.95,69.25 49.65,69.25 49,69.9 v48.1,69.9
D_PB5  (via drill 0.33)  (1 unrouted)
  Top 0.178: v49.8,70 50.45,69.35 IC12.4
  Bottom 0.178: v49.8,70 49.95,69.85 54.8,69.85 55.7,68.95 58.55,68.95 61.25,66.25
D_PB6  (via drill 0.33)  (1 unrouted)
  Top 0.178: IC13.4 53.25,68.55 54.7,70 v55.6,70
  Bottom 0.178: v55.6,70 56.25,69.35 58.7,69.35 61.6,66.45
D_PB7  (via drill 0.33)  (1 unrouted)
  Top 0.178: v56.95,70 56.95,69.4 56.05,68.5 IC14.4
  Bottom 0.178: 61.95,66.65 58.6,70 v56.95,70
D_PC0
  Bottom 0.178: U1.48 IC9.48
D_PC1
  Bottom 0.178: U1.47 IC9.47
D_PC2
  Bottom 0.178: U1.46 IC9.46
D_PC3
  Bottom 0.178: U1.45 IC9.45
D_PC4
  Bottom 0.178: U1.44 IC9.44
D_PC5
  Bottom 0.178: U1.43 IC9.43
D_PC6
  Bottom 0.178: U1.42 IC9.42
D_PC7
  Bottom 0.178: U1.41 IC9.41
D_PD0
  Bottom 0.178: U1.40 IC9.40
D_PD1
  Bottom 0.178: U1.39 IC9.39
D_PD2
  Bottom 0.178: U1.38 IC9.38
D_PD3
  Bottom 0.178: U1.37 IC9.37
D_SCLK
  Top 0.178: U1.13 IC9.13
  Bottom 0.178: U1.13
D_SIN0
  Top 0.178: U1.17 IC9.17
D_SIN1
  Top 0.178: U1.16 IC9.16
D_SIN2
  Top 0.178: U1.15 IC9.15
D_SIN3
  Top 0.178: U1.14 IC9.14
D_SOUT0
  Bottom 0.178: U1.19 IC9.19
D_SOUT1
  Top 0.178: U1.18 IC9.18
GND  (via drill 0.33)  (7 unrouted)
  Top 0.178: v57.5,57.25 58.1,57.25 58.2,57.15 IC16.2 | 57.55,59.75 58,59.75 58.2,59.95 IC17.2 | v57.5,62.6 58,62.6 58.2,62.8 IC18.2 | v52.7,65.35 52.6,65.45 IC13.2 | v50.05,65.3 49.8,65.55 IC12.2 | v44.2,65.3 IC8.2 | v41.4,65.3 IC7.2 | v47,65.3 IC10.2 | v38.6,65.3 IC6.2 | IC11.11 48.45,62.3 48.75,62 49.1,62 49.4,61.7 49.4,60.05 v49.05,59.7 | IC15.2 59.15,54.35 59.35,54.15 59.35,53.4 58.75,52.8 58.75,50.75 59.35,50.15 C2.1
  Top 0.305: v55.4,65.35 IC14.2 | 57.55,59.75 v57.5,59.75 56.6,59.75 55.95,59.1 IC11.95 53.95,59.1 v53.65,58.8 | IC3.2 38.2,55.6 v38.45,55.85 38.7,55.6 IC11.38 | v38.1,58.5 38,58.4 IC4.2 | v37.8,61.55 37.45,61.2 IC1.2 | v37.8,64 IC2.2 36.25,64 35.95,64.3 v35.95,64.65 35.95,64.95 36.35,65.35 v36.6,65.35 | IC11.59 45.45,49.05 v45.1,49.4 | 60.8,67.95 58.8,67.95 58.8,67.7 C1.2 | C3.2 IC19.2 60.8,67.95 | 60.8,67.95 v60.8,70.35 60.45,70.7 42.7,70.7 | IC11.43 38.35,53.1 v38.2,52.95 37.8,52.55 IC5.2 36.75,52.55 36.25,52.05 v36.25,51.3 | v37.8,61.55 | v37.8,61.55 | IC11.26 39.95,62 v39.47,62.48 | v40.3,63.45 40.15,63.45 38.6,65 v38.6,65.3 | v38.6,65.3 | 41.85,70.7 34.95,70.7 v34.45,70.2 v34.45,68.6 34.1,68.25 34.1,67.4 36.15,65.35 v36.6,65.35 | IC11.74 52.95,47 v52.6,46.65 | IC9.32 U1.32 58.93,20.1 60.1,20.1 | IC9.32 58.25,22.1 | C2.1 59.95,47.3 v58.45,45.8 | 58.26,22.84 IC9.32 | IC9.12 22.7,20.65 21.8,19.75 | 0.55,39 1,39.45 TP_GND.TP 1.35,40.5 v1.35,41.45 | 0.55,39 0.55,28.55 v2.2,28.55 | IC11.86 53.75,54.6 v53.7,54.65 | v49.55,18.25 50.25,18.95 v50.25,22.7 | 0.55,39 1.2,38.35 v1.35,38.35 | v36.6,65.35 36.65,65.3 v38.6,65.3 | 41.85,70.7 v40.75,69.6 | 41.85,70.7 42.7,70.7 | v43.75,69.6 42.7,70.65 42.7,70.7 | v42.05,61.65 v42.05,60.75 v42.05,59.85 42.05,57.65 v45.25,54.45 | v49.05,55.2 v49.05,56.1 v49.05,57 v49.05,57.9 v49.05,58.8
  Bottom 0.178: v57.5,62.6 57.5,62.75 | v52.7,65.35 52.1,65.95 51.45,65.95 50.8,65.3 v50.05,65.3 49.4,65.95 48.8,65.95 48.15,65.3 v47,65.3 v44.2,65.3 43.55,65.95 42.95,65.95 42.3,65.3 v41.4,65.3 40.75,65.95 40.2,65.95 39.55,65.3 v38.6,65.3 | 57.5,59.7 v57.5,59.75
  Bottom 0.279: 5.8,18.6 5.8,19.85 7.6,21.65
  Bottom 0.305: v57.5,59.75 57.7,59.95 57.7,62.4 v57.5,62.6 57.7,62.8 57.7,63.85 57.4,64.15 57.05,64.15 55.85,65.35 v55.4,65.35 55.25,65.5 52.85,65.5 v52.7,65.35 | 57.7,54.25 57.75,54.2 57.7,54.25 | 57.7,54.25 57.7,57.05 v57.5,57.25 57.7,57.45 57.7,59.5 57.5,59.7 | 57.7,54.25 | 38,58.5 37.4,57.9 | 37.4,57.9 | 37.4,57.9 37.4,56.9 v38.45,55.85 38.4,55.85 37.75,55.2 37.75,54.6 38.2,54.15 v38.2,52.95 | v37.8,64 v37.8,61.55 37.65,61.55 37.1,61 37.1,60.25 | 54.43,55.38 54.9,55.85 54.9,57.55 v53.65,58.8 54.7,59.85 | 54.43,55.38 v53.7,54.65 | 57.7,54.25 57.75,54.25 57.75,51.75 | v38.6,65.3 38.6,65.5 | 37.1,60.25 | 38,58.5 38,59.35 37.1,60.25 | 37.1,60.25 | 38,58.5 v38.1,58.5 | v38.1,58.5 | 51.6,45.65 v52.6,46.65 | JP50.GND 52.81,64.1 54.9,64.1 55.35,63.65 55.35,60.5 54.7,59.85 | v34.45,70.2 C77.1 C76.1 | 57.75,51.75 57.75,51.45 58.65,50.55 58.65,45.98 58.63,45.98 v58.45,45.8 | 31.1,42 30.7,41.6 29.95,42.35 v26.35,42.35 v24.35,42.35 v22.35,42.35 v20.35,42.35 v18.35,42.35 v16.35,42.35 v14.35,42.35 v12.35,42.35 v10.35,42.35 v8.35,42.35 v6.35,42.35 | C60.2 16.75,27.5 16.1,28.15 8.6,28.15 7.6,27.15 7.6,25.4 8.13,24.87 7.6,24.34 7.6,21.65 | v2.2,28.55 v2.2,33.7 | v2.2,33.7 1.7,34.2 C75.1 C74.1 4,35.25 4.35,34.9 v4.35,34.35 v6.35,34.35 v8.35,34.35 v10.35,34.35 v12.35,34.35 v14.35,34.35 v16.35,34.35 v18.35,34.35 v20.35,34.35 | 57.75,51.75 C52.1 | 36.9,20.7 38.75,20.7 v38.85,20.6 40.6,20.6 v40.65,20.55 42.35,20.55 v42.4,20.6 44.2,20.6 v44.25,20.55 45.9,20.55 v45.95,20.5 47.8,20.5 48.5,19.8 | 48.5,19 49.25,18.25 v49.55,18.25 | v53.6,61 53.6,60.95 54.7,59.85 | 54.43,55.38 v53.7,56.1 | v45.1,49.4 46.15,48.35
  Bottom 0.305: IC9.12 22.25,22.52 22.25,29.15 22.5,29.4 22.5,30.95 21.1,32.35 v19.35,32.35 | v5.35,36.35 v7.35,36.35 v9.35,36.35 v11.35,36.35 v13.35,36.35 v15.35,36.35 v17.35,36.35 v19.35,36.35 v21.35,36.35 v23.35,36.35 22.35,35.35 v22.35,34.35 v20.35,34.35 | v20.35,34.35 20.35,33.35 v19.35,32.35 | v19.35,32.35 v17.35,32.35 v15.35,32.35 v13.35,32.35 v11.35,32.35 v9.35,32.35 v7.35,32.35 | v3.35,32.35 v5.35,32.35 | v4.35,30.35 3.35,31.35 v3.35,32.35 | v2.2,33.7 3.35,32.55 v3.35,32.35 | v1.35,32.35 2.2,33.2 v2.2,33.7 | 56.65,36.55 57.45,37.35 59.7,37.35 59.7,38 | 48.45,59.1 48.45,58.8 v49.05,58.8 | v42.05,60.75 41.75,60.45 39.9,60.45 39.47,60.88 v39.47,62.48 39.47,62.62 v40.3,63.45 | C68.1 44.85,54.85 v45.25,54.45 v45.25,53.6 v45.25,52.75
  Bottom 0.406: C59.1 C62.1 49.95,51.8 50.5,52.35 C58.1 C57.1 50.5,55.35 50.75,55.6 C56.1 C55.1 C54.1 C53.1 50.15,60.55 49.3,59.7 v49.05,59.7 48.45,59.1 48.45,59 C63.1 C64.1 44.5,59 44,58.5 C66.1 C67.1 C68.1 C69.1 43.95,53.4 43.95,52.85 43.4,52.3 C70.1 C71.1 44.15,50.35 v45.1,49.4
  other vias: 1.35,27.35 1.35,25.35 4.35,27.35 3.35,25.35 6.35,27.35 5.35,25.35 4.35,23.35
  pour Top (isolate 0.152, rank 2): -1.45,44.7 87.8,44.7 87.85,-2.6 -1.45,-2.6
  pour Bottom (isolate 0.152, rank 2): -1.45,44.7 87.8,44.7 87.8,-2.6 -1.45,-2.6
GND6  (via drill 0.33)
  other vias: 6.35,23.35
M_A15  (1 unrouted)
  Top 0.178: 50.45,45.6 IC11.69
M_A16  (1 unrouted)
  Top 0.178: 49.95,45.6 IC11.68
M_A17/M_A14  (2 unrouted)
  Top 0.178: 49.55,45.7 49.55,47.15 49.45,47.25 IC11.67
MSEL0  (3 unrouted)
MSEL0_ECU  (1 unrouted)
MSEL1  (3 unrouted)
MSEL1_ECU  (1 unrouted)
MSEL2  (3 unrouted)
  Top 0.178: 50.95,45.6 IC11.70
MSEL2_ECU  (1 unrouted)
SGND
  pour Top (isolate 0.254): 0.05,14.15 6.8,14.15 7.3,13.65 7.3,4.75 6.8,4.25 0.1,4.25
  pour Bottom (isolate 0.254): 0.05,14.15 6.8,14.15 7.3,13.65 7.3,4.75 6.8,4.25 0.1,4.25
TCK  (via drill 0.33)
  Top 0.178: IC11.62 46.95,48.95 47.75,49.75 v48.15,49.75 | v47.95,53.75 48.55,54.35 48.55,54.85 48.3,55.1 48.3,60.9 v48.8,61.4
  Bottom 0.178: JP50.TCK 49.27,61.87 v48.8,61.4 | v48.15,49.75 48.15,53.55 v47.95,53.75
TDI  (via drill 0.33)
  Top 0.178: IC11.4 51.95,62.2 50.7,60.95 50.7,55.6 48.25,53.15 47.5,53.15 43.75,56.9 v43.75,61.85
  Bottom 0.178: v43.75,61.85 43.75,62.6 44.25,63.1 JP50.TDI
TDO  (via drill 0.33)
  Top 0.178: IC11.73 52.45,48.9 52.2,49.15 50,49.15 v48.75,50.4 | v47.95,54.6 v47.95,61.7
  Bottom 0.178: v47.95,61.7 47.95,61.85 46.73,63.07 JP50.TDO | v47.95,54.6 48.75,53.8 v48.75,50.4
TMS  (via drill 0.33)
  Top 0.178: IC11.15 46.45,62.3 46,61.85 v45.95,61.85
  Bottom 0.178: v45.95,61.85 45.1,62.7 45.1,63.55 44.6,64.05 43.8,64.05 42.85,63.1 JP50.TMS 40.8,62.25 R50.1
VCC  (via drill 0.33)  (5 unrouted)
  Top 0.178: IC19.3 61.75,65.05 61.55,64.85 59.3,64.85 59.1,65.05 C3.1
  Top 0.305: TP_VCC.TP 2.15,41.9 2.9,41.15 3.17,41.15 IC9.64 | IC19.1 59.5,66.9 59.1,66.5 C3.1 57.45,65.65 | 57.45,65.65 v57.45,66.15 | v60.45,55.75 IC15.6 | v60.45,58.55 IC16.6 | IC18.6 v60.45,64.2 60.25,64.4 58.35,64.4 v57.45,65.3 57.45,65.65 | v60.45,61.35 IC17.6 | IC14.6 54.45,68.05 53.8,67.4 v53.8,67.2 | v51,67.2 51,67.4 51.65,68.05 IC13.6 | v48.4,67.4 48.4,67.6 48.85,68.05 IC12.6 | v45.8,67.2 45.8,67.8 46.05,68.05 IC10.6 | v42.8,67.4 42.8,67.6 43.25,68.05 IC8.6 | v40,67.4 40,67.6 40.45,68.05 IC7.6 | v37.2,67.4 37.2,67.6 37.65,68.05 IC6.6 | v35.15,62.6 35.15,63.35 IC2.6 | v35.15,59.8 35.15,60.55 IC1.6 | v35.1,51.15 35.45,51.5 IC5.6 | v60.45,52.95 59.95,52.45 C2.2 | IC3.6 35.15,54.25 v35.1,54.2 | IC4.6 35.15,57.05 v35.1,57
  Bottom 0.305: v57.45,66.15 57.45,66 53.55,66 53.15,66.4 45.5,66.4 45.2,66.7 39.2,66.7 39.1,66.6 36.9,66.6 35.15,64.85 v35.15,62.6 v35.15,59.8 35.15,57.1 | 35.15,65.7 35.15,66.75 35.5,67.1 35.85,66.75 36.65,66.75 37.2,67.3 v37.2,67.4 | IC9.64 3.15,41.13 | v60.45,64.2 v60.45,61.35 v60.45,58.55 v60.45,55.75 v60.45,52.95 | v37.2,67.4 v40,67.4 v42.8,67.4 45.6,67.4 v45.8,67.2 48.2,67.2 v48.4,67.4 48.6,67.2 v51,67.2 v53.8,67.2 54.5,66.5 57.6,66.5 58,66.1 58,65.5 57.65,65.5 v57.45,65.3 | v35.1,57 v35.1,54.2 v35.1,51.15 34.05,50.1 | v37.2,67.4 C76.2
  Bottom 0.406: IC9.64 U1.64 3.14,36.95 C74.2 C75.2 1,36.95 | 3.15,43.05 3.55,43.05 3.15,42.65 | 34.05,50.1 34.05,64.6 35.15,65.7 | 0.6,36.55 0.6,37.35 | 0.6,37.35 0.6,42.35 | 0.6,42.35 1.3,43.05 | 1.3,43.05 2.75,43.05 | 2.75,43.05 3.15,43.05 | 0.6,36.55 1,36.95 | 0.6,37.35 1,36.95 | 0.6,42.35 0.6,42.7 0.95,43.05 1.3,43.05 | 3.15,43.05 3.15,42.65 | 3.15,42.65 3.15,41.13 | 2.75,43.05 3.15,42.65 | 0.6,36.55 0.6,21.1 1.35,20.35
  pour Top: 57.1,64.3 57.1,66.9 62.1,66.9 62.1,61 60.35,62.7 60.35,64.3
  pour Bottom: 56.9,66.55 57.6,66.55 58.05,66.1 58.05,65.45 57.3,64.7 57.15,64.7 57.1,64.75 57.1,66
  pour Bottom: 61.05,51.35 59.85,51.35 59.85,54.95 59.8,55.35 59.8,64.35 60.2,64.75 60.15,66.85 60.55,66.85 61.05,66.35
  pour Bottom: 34,50.15 35.05,51.2 35.05,57 35.15,57.1 35.15,64.75 37,66.6 39.1,66.6 39.2,66.7 45.2,66.7 45.5,66.4 53.2,66.4 53.6,66 57.1,66 57.1,66.5 54.5,66.5 53.8,67.2 45.8,67.2 45.6,67.4 37.25,67.4 36.65,66.75 35.85,66.75 35.5,67.1 35.1,66.7 35.1,65.7 34,64.6
VCC_CPLD  (via drill 0.33)  (3 unrouted)
  Top 0.305: v41.7,49.35 41.45,49.1 IC11.51 | v41.25,55 41.15,55.1 IC11.39 38.65,55.1 v38.45,54.9 37.75,54.9 37.7,54.95 | v41.25,57.85 41,57.6 IC11.34 | v44.95,61.85 IC11.18 | v53.7,57.1 IC11.91 | v53.55,52.6 IC11.82 | v48.95,49.35 IC11.66 v48.95,46.55 | IC15.1 57.5,55 v57,54.5 | IC16.1 58.15,57.8 58,57.95 56.9,57.95 v56.85,57.9 | v57,60.6 IC17.1 | v57,63.45 IC18.1 | v54.6,64.8 54.65,64.85 54.65,65.65 54.75,65.75 IC14.1 | v51.75,65.3 51.95,65.5 IC13.1 | v49.1,65.3 49.15,65.35 IC12.1 | v43.25,65.3 43.55,65.6 IC8.1 | v40.45,65.3 40.75,65.6 IC7.1 | v46.3,64.6 46.3,65.7 46.35,65.75 IC10.1 | v38.1,57.55 37.9,57.75 IC4.1 | v38.65,63.25 38.55,63.35 IC2.1 | v38.65,52.1 38.45,51.9 IC5.1 | IC1.1 37.8,60.55 v37.85,60.6 | 37.2,66.25 IC6.1 | 37.7,54.95 | 37.7,54.95 IC3.1 | v52.45,61.8 IC11.3 | v37.2,65.95 37.2,66.25 | 37.2,66.25 37.2,66.4 v36.2,67.4
  Top 0.406: IC19.5 C1.1 57.8,69.4 56.65,68.25 56.65,64.8 v56.05,64.2 53.65,61.8 v52.45,61.8
  Bottom 0.178: v41.25,57.85 40.8,58.3 R50.2
  Bottom 0.305: 56.95,54.5 v57,54.5 56.9,54.4 | 51.75,65.25 v51.75,65.3 | 57.05,63.45 v57,63.45 56.8,63.45 | 49.1,65.25 v49.1,65.3 | 43.25,65.25 v43.25,65.3 | 38.5,54.9 v38.45,54.9 | 38.65,64.35 38.5,64.35 | 38.2,57.55 v38.1,57.55 | JP50.VCC 53.05,61.8 v52.45,61.8 | v36.2,67.4 35.75,67.85 C77.2 | v56.85,57.9 56.8,57.85 | v48.95,46.55 48.95,45.5 48.1,44.65 | 38.8,58.15 | v37.85,60.6
  Bottom 0.406: 56.95,54.5 56.95,56.8 56.8,56.95 56.8,57.85 | v57,63.45 56.8,63.25 56.8,60.8 v57,60.6 56.8,60.4 56.8,57.95 v56.85,57.9 | 51.75,65.25 52.35,64.65 54.45,64.65 v54.6,64.8 54.75,64.65 55.6,64.65 v56.05,64.2 56.8,63.45 | v51.75,65.3 51.05,64.6 49.75,64.6 49.1,65.25 | v49.1,65.3 48.4,64.6 v46.3,64.6 43.9,64.6 43.25,65.25 | v43.25,65.3 42.45,64.5 41.05,64.5 40.45,65.1 v40.45,65.3 39.5,64.35 38.65,64.35 v38.65,63.25 38.65,61.4 v37.85,60.6 38.8,59.65 38.8,58.15 38.2,57.55 | v38.45,54.9 38.9,54.45 38.9,52.35 v38.65,52.1 | v38.1,57.55 38.1,57.2 39.15,56.15 39.15,55.55 38.5,54.9 | 56.9,54.4 C52.2 | v44.95,61.85 45.5,61.3 C64.2 | C64.2 C63.2 49.1,60.7 50.2,61.8 v52.45,61.8 C53.2 C54.2 C55.2 | C66.2 42.3,58.8 44.2,60.7 C64.2 | C66.2 C67.2 | C66.2 v41.25,57.85 | v41.25,55 42.3,55 C68.2 C69.2 42.3,52.9 41.7,52.3 C70.2 C71.2 v41.7,49.35 | v53.7,57.1 53.05,57.75 C55.2 | C55.2 C56.2 52.45,55.6 52.2,55.35 C57.2 C58.2 | v53.55,52.6 53,53.15 C58.2 | C58.2 52.2,52.5 53,51.7 53,50.05 52.25,49.3 C59.2 C62.2 49.9,49.35 v48.95,49.35 | 56.8,63.45 | 38.5,64.35 37.8,65.05 37.8,65.35 v37.2,65.95
  pour Top (no thermals): 54.25,61.75 53.55,62.45 53.55,63.95 53.75,64.15 54.15,64.15 54.45,63.85 55.05,63.85 56.15,64.95 56.15,65.85 56.65,65.85 56.65,64.05 56.25,63.65 56.25,62.2 55.8,61.75

## Text on the board
tPlace: ToyoTune LVC 2.0 | Copyright 2016, Powertrain Logic LLP | GND | 0 | 1 | 2
bPlace: TMS | TDI | TDO | TCK | GND | VCC